# Altium PCB Main-PCB.pcbdoc
Units mil, origin at the board's own origin, x right, y up, seen from the top; angles counter-clockwise.
Board outline 3937 x 3937 mil, 2 copper layers (Top Layer, Bottom Layer), stack 62.2 mil thick; 82 components, 62 nets, 333 pads, 136 vias.
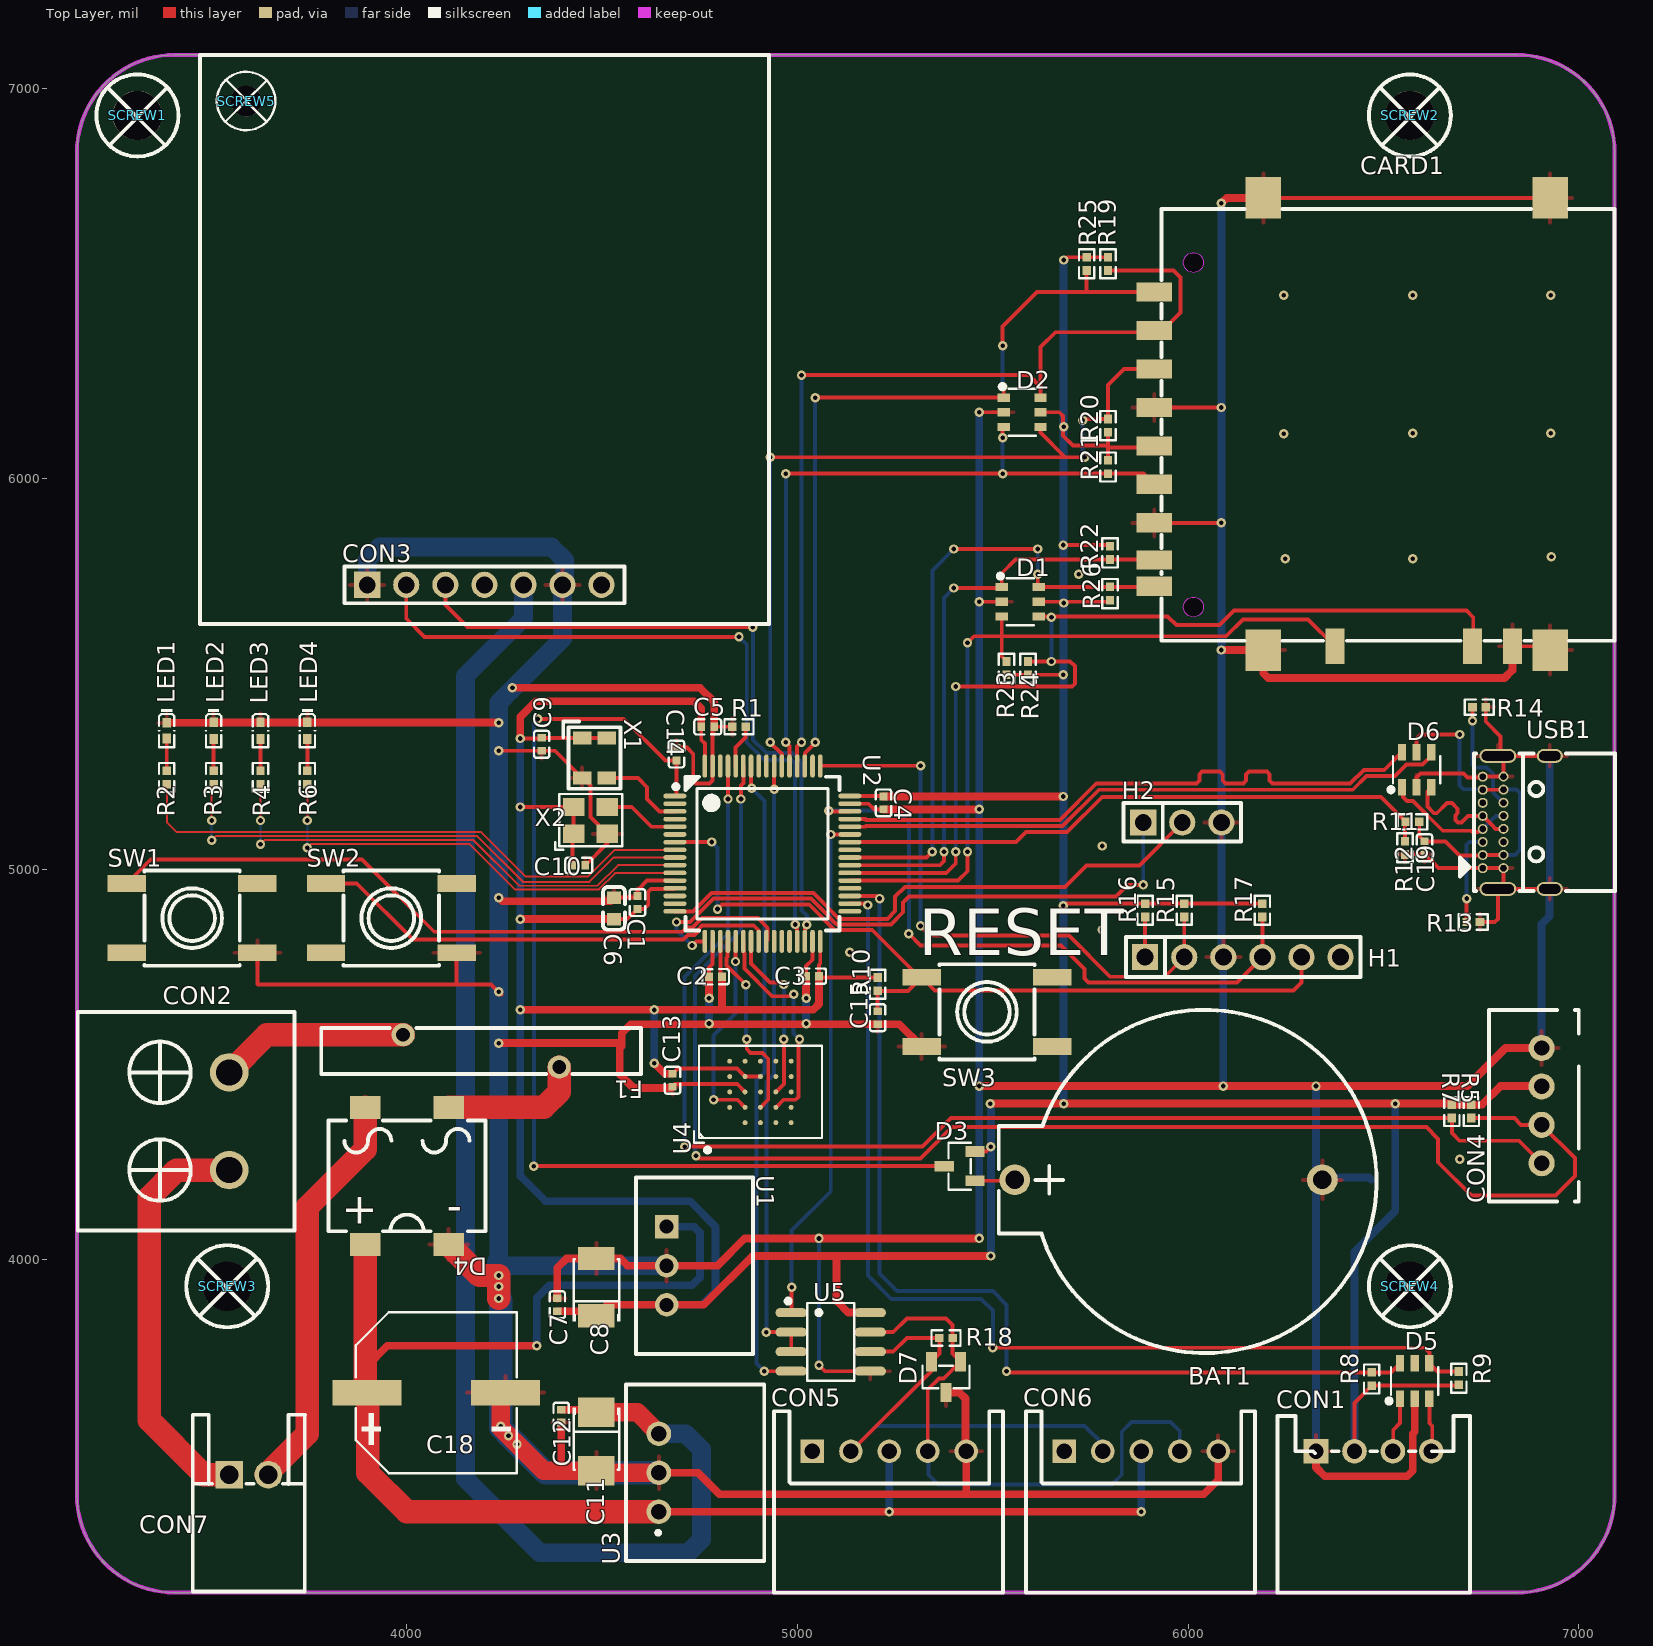
[diagram p0: Top Layer view]
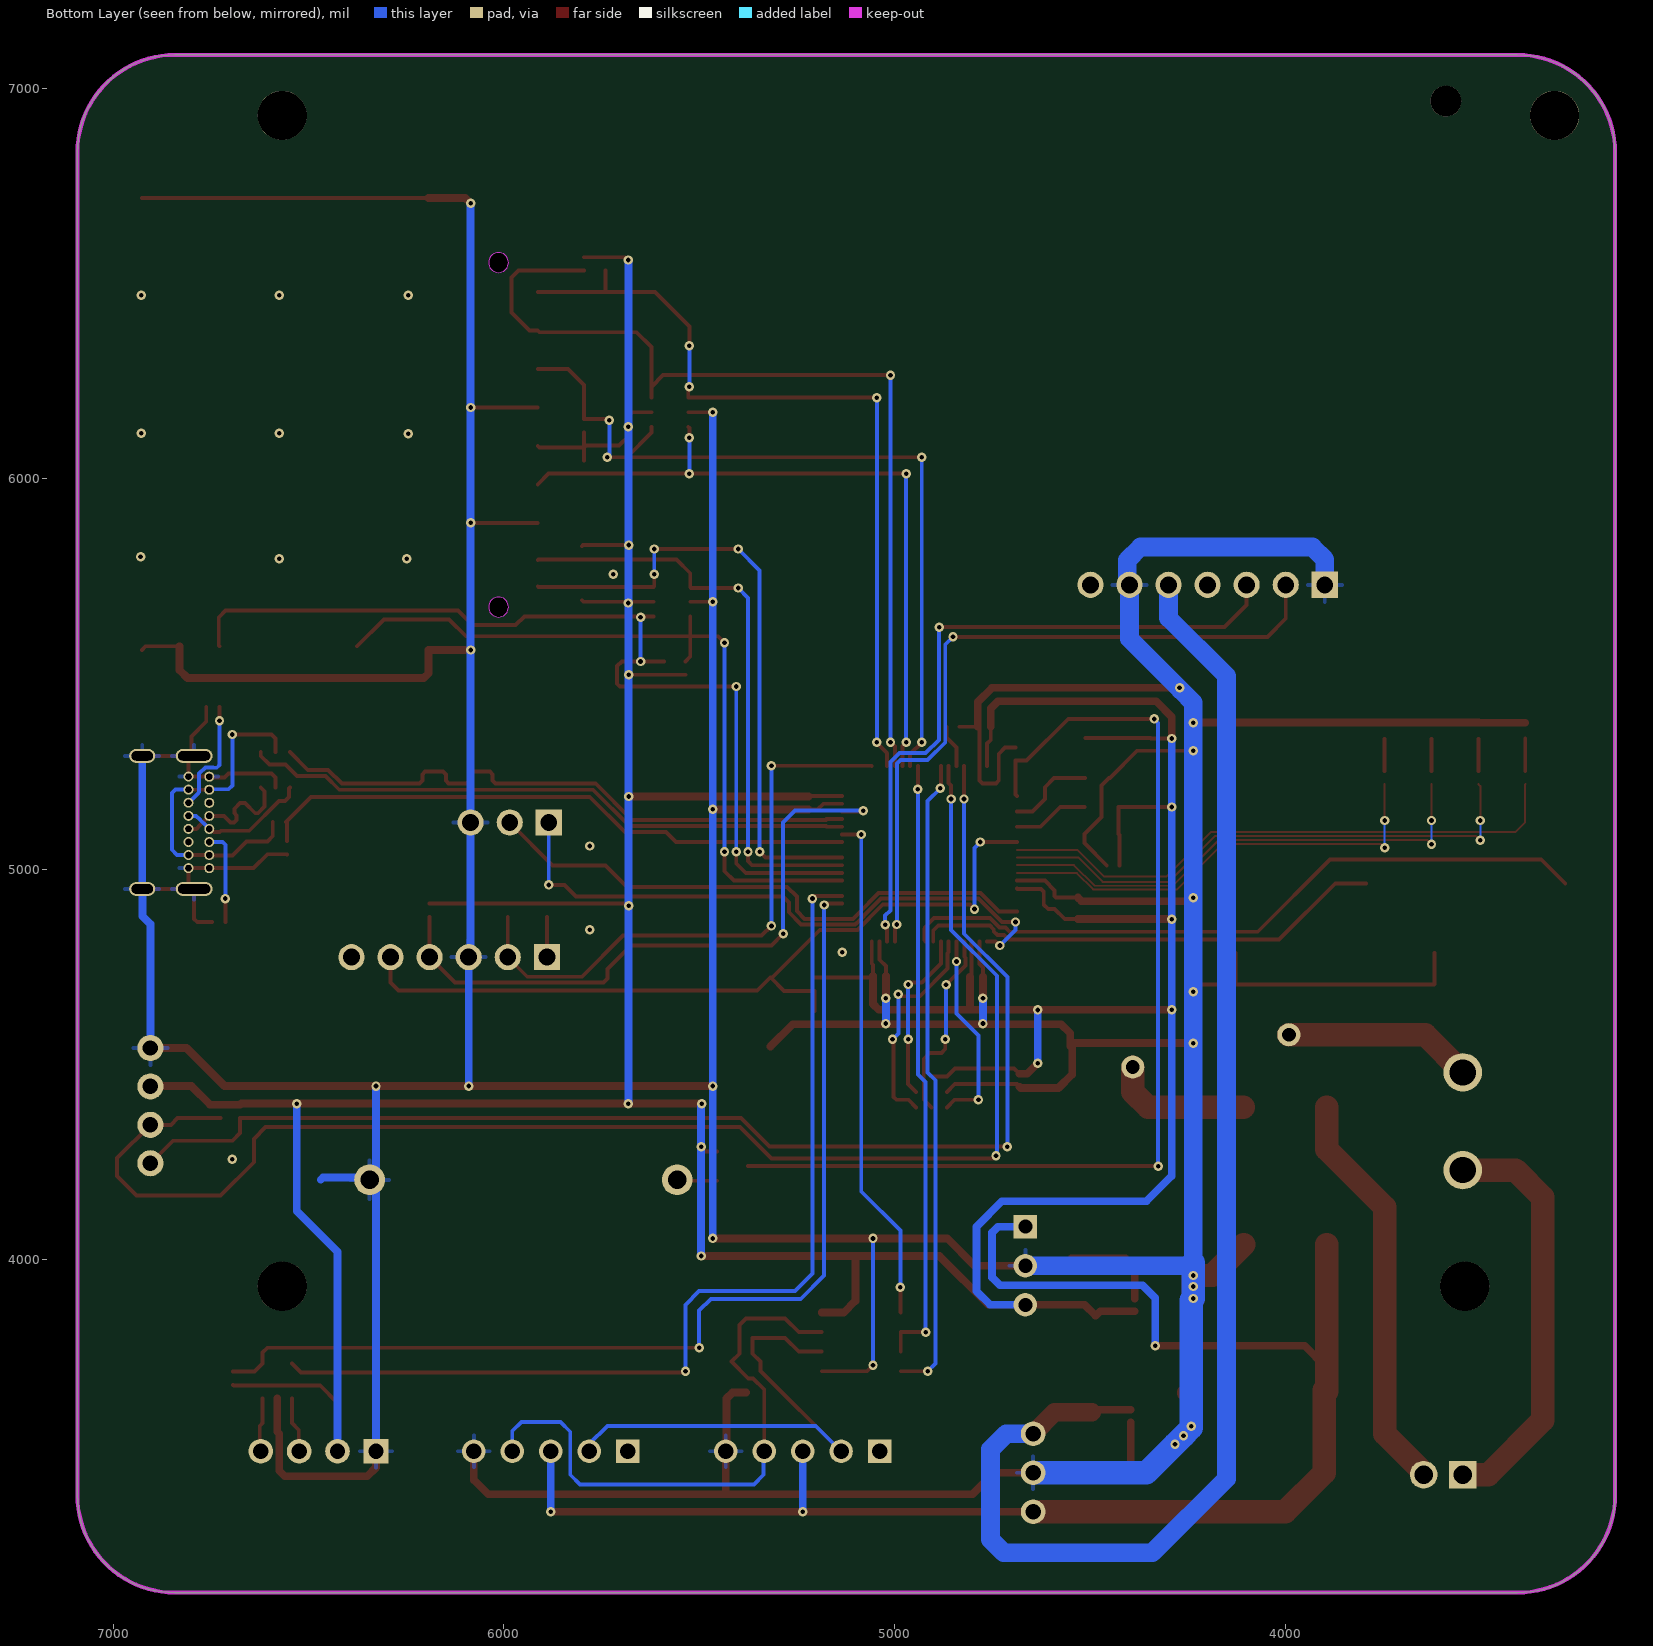
[diagram p1: Bottom Layer view, seen from below]

## Layer stack, top to bottom
Top Solder Mask Layer: solder mask 0.4, Dk 3.3
Top Layer: signal copper 1.4
Dielectric1: surface 59.4, FR4, Dk 4.5
Bottom Layer: signal copper 1.4
Bottom Solder Mask Layer: solder mask 0.4, Dk 3.3

## Board outline
3405,7085 ccw(c3405,6835) 3155,6835 3155,3398 ccw(c3405,3398) 3405,3148 6842,3148 ccw(c6842,3398) 7092,3398 7092,6835 ccw(c6842,6835) 6842,7085

## Design rules (kind name [scope] priority, off if disabled: settings)
BoardOutlineClearance copperThickness1oz [All] p0: genericclearance=10 ignorepadtopadclearanceinfootprint=FALSE except(0: Arc-SplitContinuation Track-SplitContinuation SMDPad-SplitContinuation THPad-SplitContinuation Via-SplitContinuation Fill-SplitContinuation Poly-SplitContinuation Region-SplitContinuation Text-SplitContinuation)
BoardOutlineClearance copperThickness2oz [All] p0: genericclearance=10 ignorepadtopadclearanceinfootprint=FALSE except(0: Arc-SplitContinuation Track-SplitContinuation SMDPad-SplitContinuation THPad-SplitContinuation Via-SplitContinuation Fill-SplitContinuation Poly-SplitContinuation Region-SplitContinuation Text-SplitContinuation)
BoardOutlineClearance Plane_innerPlane [All] p0: genericclearance=10 ignorepadtopadclearanceinfootprint=FALSE except(0: Arc-SplitContinuation Track-SplitContinuation SMDPad-SplitContinuation THPad-SplitContinuation Via-SplitContinuation Fill-SplitContinuation Poly-SplitContinuation Region-SplitContinuation Text-SplitContinuation)
BoardOutlineClearance Copper_copperRegion [All] p0: genericclearance=10 ignorepadtopadclearanceinfootprint=FALSE except(0: Arc-SplitContinuation Track-SplitContinuation SMDPad-SplitContinuation THPad-SplitContinuation Via-SplitContinuation Fill-SplitContinuation Poly-SplitContinuation Region-SplitContinuation Text-SplitContinuation)
BoardOutlineClearance otherClearance [All] p0: genericclearance=10 ignorepadtopadclearanceinfootprint=FALSE except(0: Arc-SplitContinuation Track-SplitContinuation SMDPad-SplitContinuation THPad-SplitContinuation Via-SplitContinuation Fill-SplitContinuation Poly-SplitContinuation Region-SplitContinuation Text-SplitContinuation)
Clearance copperThickness1oz [All] p1: gap=7 ignorepadtopadclearanceinfootprint=FALSE
Clearance copperThickness2oz [All] p1: gap=7 ignorepadtopadclearanceinfootprint=FALSE
Clearance Plane_innerPlane [All] p1: gap=7 ignorepadtopadclearanceinfootprint=FALSE
Clearance Copper_copperRegion [All] p1: gap=7 ignorepadtopadclearanceinfootprint=FALSE
Clearance otherClearance [All] p1: gap=7 ignorepadtopadclearanceinfootprint=FALSE
DiffPairsRouting differentialPair [All] p1: maxuncoupledlength=10 minlimit=6 maxlimit=Infinity mostfreqgap=6 toplayer_minwidth=5 toplayer_prefwidth=10 toplayer_maxwidth=100 bottomlayer_minwidth=5 bottomlayer_prefwidth=10 bottomlayer_maxwidth=100
PasteMaskExpansion pasteMaskExpansion [All] p1: expansion=0
PlaneConnect innerPlane [All] p1: planeconnectstyle=Relief reliefexpansion=20 reliefentries=4 reliefconductorwidth=10 reliefairgap=10
PolygonConnect copperRegion [All] p1: connectstyle=Relief reliefentries=4 reliefconductorwidth=10 polygonreliefangle="90 Angle" airgapwidth=10
RoutingVias viaSize [All] p1: viastyle="Through Hole" holewidth=12.0078 minholewidth=11.811 maxholewidth=248.0314 width=12.0078 minwidth=11.811 maxwidth=248.0314
SolderMaskExpansion solderMaskExpansion [IsVia] p1: useseparateexpansions=TRUE expansion=-1000 expansionbottom=-1000
SolderMaskExpansion solderMaskExpansion [All] p2: useseparateexpansions=TRUE expansion=2 expansionbottom=2
Width copperThickness1oz [All] p1: maxlimit=100 minlimit=5 preferedwidth=10
Width copperThickness2oz [All] p1: maxlimit=100 minlimit=8 preferedwidth=10

## Components (designator, comment, footprint, x,y, rotation, side; value= is the part's Value field where it differs from the comment)
BAT1 "KH-CR2032-2-1" BAT-TH_KH-CR2032-2-1 5950,4205 r180 top
C1 "100nF" C0402#1 4590.1,4914.9 r90 top
C2 "100nF" C0402#1 4790.1,4724.9 r180 top
C3 "100nF" C0402#2 5038.5,4726.5 r180 top
C4 "100nF" C0402#2 5220.1,5169.9 r270 top
C5 "100nF" C0402#2 4770.1,5364.9 r0 top
C6 "1uF" C0603 4530.1,4899.9 r90 top
C7 "100nF" C0402#3 4385,3885 r90 top
C8 "100uF" CASE-B_3528 4485,3930 r90 top
C9 "100nF" C0402#3 4345,5320 r90 top
C10 "100nF" C0402#3 4440,5010 r180 top
C11 "100uF" CAP-SMD_L3.5-W2.8-R-RD 4485,3535 r90 top
C12 "100nF" C0402#3 4395,3600 r270 top
C13 "100nF" C0402#3 4680,4460 r270 top
C14 "100nF" C0402#2 4690.1,5294.9 r270 top
C15 "100nF" C0402#3 5205,4620 r270 top
C18 "470uF" CAP-SMD_BD10.0-L10.3-W10.3-LS11.3-FD 4075,3660 r0 top
C19 "100nF" C0402#3 6605,5055 r270 top
CARD1 "DM1AA-SF-PEJ(82)" SD-SMD_DM1AA-SF-PEJ-82 6420,6140 r0 top locked
CON1 "S4B-XH-A(LF)(SN)" CONN-TH_S4B-XH-A-LF-SN 6475,3510 r180 top
CON2 "DBT50G-6.35-2P-BK-P OGC" CONN-TH_2P-P6.35_DBT50G-6.35-2P-BK-P 3545,4355 r270 top
CON3 "HC-PM254-5.0H-1x7PZ" HDR-TH_7P-P2.54-V-M-3 4198.3,5728.3 r0 top locked
CON4 "B4B-XH-A(LF)(SN)" CONN-TH_B4B-XH-A-LF-SN 6905,4395 r90 top
CON5 "S5B-XH-A(LF)(SN)" CONN-TH_5P-P2.50_S5B-XH-A-LF-SN 5235,3510 r0 top
CON6 "S5B-XH-A(LF)(SN)" CONN-TH_5P-P2.50_S5B-XH-A-LF-SN 5880,3510 r0 top
CON7 "S2B-XH-A-1(LF)(SN)" CONN-TH_S2B-XH-A-1-LF-SN 3595,3450 r180 top
D1 "USBLC6-4SC6Y-ES" TSOT-23-6_L2.9-W1.6-P0.95-LS2.8-BR 5570,5685 r180 top
D2 "USBLC6-4SC6Y-ES" TSOT-23-6_L2.9-W1.6-P0.95-LS2.8-BR 5575,6170 r180 top
D3 "BAT54C" SOT-23-3_L2.9-W1.3-P1.90-LS2.4-BR 5415,4240 r0 top
D4 "HBS510" DIO-BG-SMD_4P-L10.2-W7.0-P5.42-LS9.9-TR 4000,4215 r180 top
D5 "USBLC6-2SC6" SOT-23-6_L2.9-W1.6-P0.95-LS2.8-BL 6580,3690 r0 top
D6 "USBLC6-2SC6" SOT-23-6_L2.9-W1.6-P0.95-LS2.8-BL 6585,5255 r0 top
D7 "CDSOT23-SM712" SOT-23-3_L2.9-W1.3-P0.95-LS2.4-BR 5380,3700 r90 top
F1 "RXEF250" FUSE-TH_L20.8-W3.0-P10.15-D0.6-S2.10 4190,4535 r180 top
H1 "2541WV-06P" HDR-TH_6P-P2.54-V-M 6140,4775 r0 top
H2 "PH2.54-1X3P-H25" HDR-TH_3P-P2.54-V-M 5985,5120 r0 top
LED1 "TZ-P2-0402RTIA1-0.45T" LED0402-RD_RED 3385,5355 r270 top
LED2 "XL-1005UYC" LED0402-FD_YELLOW 3505,5355 r90 top
LED3 "BL-HGK37A-AV-TRB" LED0402 3625,5355 r270 top
LED4 "SZYY0402B" LED0402-RD_BLUE 3745,5355 r270 top
R1 "10kΩ" R0402#1 4850.1,5364.9 r180 top
R2 "220Ω" R0402#2 3385,5235 r90 top
R3 "220Ω" R0402#2 3505,5235 r90 top
R4 "220Ω" R0402#2 3625,5235 r90 top
R5 "4.7kΩ" R0402#2 6725,4380 r270 top
R6 "220Ω" R0402#2 3745,5235 r90 top
R7 "4.7kΩ" R0402#2 6675,4380 r270 top
R8 "4.7kΩ" R0402#2 6470,3695 r90 top
R9 "4.7kΩ" R0402#1 6693,3697 r90 top
R10 "10kΩ" R0402#1 5205,4705.9 r90 top
R11 "4.7kΩ" R0402#1 6574.6,5121.5 r180 top
R12 "10kΩ" R0402#2 6555,5055 r90 top
R13 "5.1kΩ" R0402#2 6730,4865 r180 top
R14 "5.1kΩ" R0402#2 6745,5415 r0 top
R15 "10kΩ" R0402#2 5990,4895 r90 top
R16 "220Ω" R0402#2 5890,4895 r270 top
R17 "10kΩ" R0402#2 6190,4895 r270 top
R18 "120Ω" R0402#2 5380,3800 r0 top
R19 "10kΩ" R0402#2 5795,6550 r90 top
R20 "10kΩ" R0402#3 5795,6135.9 r270 top
R21 "10kΩ" R0402#2 5795,6030 r90 top
R22 "10kΩ" R0402#2 5800,5810 r90 top
R23 "10kΩ" R0402#2 5535,5515 r90 top
R24 "10kΩ" R0402#2 5590,5515 r90 top
R25 "10kΩ" R0402#2 5740,6550 r270 top
R26 "10kΩ" R0402#1 5800,5705.9 r90 top
SCREW1 "" Screw-Hole-M3 3312.5,6927.5 r0 top locked
SCREW2 "" Screw-Hole-M3 6570,6927.5 r0 top locked
SCREW3 "" Screw-Hole-M3 3542.5,3930 r0 top
SCREW4 "" Screw-Hole-M3 6570,3930 r0 top locked
SCREW5 "" Screw-Hole-M2 3588.1,6966.9 r0 top locked
SW1 "K2-1157SP-I4SW-01" SW-SMD_4P-L6.2-W6.2-P4.50-LS8.6 3450,4875 r0 top
SW2 "K2-1157SP-I4SW-01" SW-SMD_4P-L6.2-W6.2-P4.50-LS8.6 3960,4875 r0 top
SW3 "K2-1157SP-I4SW-01" SW-SMD_4P-L6.2-W6.2-P4.50-LS8.6 5485,4635 r0 top
U1 "R-78E3.3-0.5" PWRM-TH_YLPTEC_R-78EXXX 4665,3985 r270 top
U2 "STM32L476RGT6" LQFP-64_L10.0-W10.0-P0.50-LS12.0-BL 4910,5040 r270 top
U3 "K7805-2000R3" PWRM-TH_K78XX-2000R3 4645,3455 r90 top
U4 "CY15B116QN-40BKXI" TFBGA-24_L8.0-W6.0-P1.00-TL_SPANSION_E2A024 4905,4430 r90 top
U5 "MAX3483ESA-TUDI" SOIC-8_L4.9-W3.9-P1.27-LS6.0-BL 5085,3790 r270 top
USB1 "USB4085-GF-A" USC-C-SMD_USB4085-GF-A 6840,5120 r90 top
X1 "32.768kHz" OSC-SMD_4P-L3.2-W2.5-BL_TG-5006CE 4480,5285 r270 top
X2 "8MHz" OSC-SMD_4P-L3.2-W2.5-BL 4470,5125 r0 top

## Footprints (in the part's own frame and the unit in brackets; to place one, negate y for a bottom-side part, rotate by r counter-clockwise, add the part's x,y. Pads: shape width x height; smd on the part's side, far side on the other; paste and mask are expansions set on the pad)
BAT-TH_KH-CR2032-2-1 [mil]
  round 78.7 hole 47.2: 1(393.7,0) 2(-393.7,0)
  silkscreen extent -532,-435 435,444
C0402#1 [mil]
  rect 19.7x21.3 smd: 1(-16.5,0) 2(16.6,0)
  silkscreen extent -34,-20 34,20
C0402#2 [mil]
  rect 19.7x21.3 smd: 1(-16.6,0) 2(16.5,0)
  silkscreen extent -34,-20 34,20
C0402#3 [mil]
  rect 19.7x21.3 smd: 1(-16.5,0) 2(16.5,0)
  silkscreen extent -34,-20 34,20
C0603 [mil]
  rect 31.5x35.4 smd: 1(-27.5,0) 2(27.6,0)
  silkscreen extent -55,-28 55,28
CAP-SMD_BD10.0-L10.3-W10.3-LS11.3-FD [mil]
  rect 177.2x65 smd: 1(-177.2,0) 2(177.2,0)
  silkscreen extent -206,-206 206,206
CAP-SMD_L3.5-W2.8-R-RD [mil]
  rect 74.8x93.5 smd: 1(74.8,0) 2(-74.7,0)
  silkscreen extent -72,-61 87,61
CASE-B_3528 [mil]
  rect 59.3x93.5 smd: 1(-73.2,0) 2(73.3,0)
  silkscreen extent -87,-61 72,61
CONN-TH_2P-P6.35_DBT50G-6.35-2P-BK-P [mil]
  round 98.4 hole 66.9 paste+0 mask+2: 1(-125,0) 2(125,0)
  silkscreen extent -280,-388 280,167
CONN-TH_5P-P2.50_S5B-XH-A-LF-SN [mil]
  rect 60x60 hole 39.4: 1(-196.9,0)
  round 60 hole 39.4: 2(-98.4,0) 3(0,0) 4(98.4,0) 5(196.9,0)
  silkscreen extent -295,-362 291,102
CONN-TH_B4B-XH-A-LF-SN [mil]
  round 66.9 hole 39.4: 1(147.6,0) 2(49.2,0) 3(-49.2,0) 4(-147.6,0)
  silkscreen extent -245,-95 245,135
CONN-TH_S2B-XH-A-1-LF-SN [mil]
  rect 70.9x70.9 hole 47.2: 1(50,0)
  round 70.9 hole 47.2: 2(-50,0)
  silkscreen extent -144,-154 143,299
CONN-TH_S4B-XH-A-LF-SN [mil]
  rect 63x63 hole 39.4: 1(147.6,0)
  round 63 hole 39.4: 2(49.2,0) 3(-49.2,0) 4(-147.6,0)
  silkscreen extent -246,-91 246,362
DIO-BG-SMD_4P-L10.2-W7.0-P5.42-LS9.9-TR [mil]
  rect 78.7x59.1 smd: 1(106.8,175.6) 2(-106.8,175.6) 3(-106.8,-175.6) 4(106.8,-175.6)
  silkscreen extent -201,-142 201,142
FUSE-TH_L20.8-W3.0-P10.15-D0.6-S2.10 [mil]
  round 59.1 hole 35.4 paste+0 mask+2: 1(-199.8,41.3) 2(199.8,-41.3)
  silkscreen extent -409,-59 409,59
HDR-TH_3P-P2.54-V-M [mil]
  rect 66.9x66.9 hole 43.3: 1(-100,0)
  round 66.9 hole 43.3: 2(0,0) 3(100,0)
  silkscreen extent -150,-49 150,49
HDR-TH_6P-P2.54-V-M [mil]
  rect 66.9x66.9 hole 43.3: 1(-250,0)
  round 66.9 hole 43.3: 2(-150,0) 3(-50,0) 4(50,0) 5(150,0) 6(250,0)
  silkscreen extent -299,-51 301,51
HDR-TH_7P-P2.54-V-M-3 [mil]
  rect 66.9x66.9 hole 43.3: 1(-300,0)
  round 66.9 hole 43.3: 2(-200,0) 3(-100,0) 4(0,0) 5(100,0) 6(200,0) 7(300,0)
  silkscreen extent -358,-47 358,47
LED0402 [mil]
  rect 25.1x21.3 smd paste-3937 mask+2: 1(-21.2,0) 2(21.2,0)
  silkscreen extent -43,-21 43,21
LED0402-FD_YELLOW [mil]
  rect 25.1x21.3 smd paste-3937 mask+2: 1(-21.2,0) 2(21.2,0)
  silkscreen extent -43,-21 55,21
LED0402-RD_BLUE [mil]
  rect 25.1x21.3 smd paste-3937 mask+2: 1(-21.2,0) 2(21.2,0)
  silkscreen extent -55,-21 43,21
LED0402-RD_RED [mil]
  rect 25.1x21.3 smd paste-3937 mask+2: 1(-20,0) 2(20,0)
  silkscreen extent -55,-21 43,21
LQFP-64_L10.0-W10.0-P0.50-LS12.0-BL [mil]
  oval 11.8x59.1 smd: 1(-147.6,-223.9) 2(-127.9,-223.9) 3(-108.3,-223.9) 4(-88.6,-223.9) 5(-68.9,-223.9) 6(-49.2,-223.9) 7(-29.5,-223.9) 8(-9.8,-223.9) 9(9.8,-223.9) 10(29.5,-223.9) 11(49.2,-223.9) 12(68.9,-223.9) 13(88.6,-223.9) 14(108.3,-223.9) 15(127.9,-223.9) 16(147.6,-223.9) 33(147.6,223.9) 34(127.9,223.9) 35(108.3,223.9) 36(88.6,223.9) 37(68.9,223.9) 38(49.2,223.9) 39(29.5,223.9) 40(9.8,223.9) 41(-9.8,223.9) 42(-29.5,223.9) 43(-49.2,223.9) 44(-68.9,223.9) 45(-88.6,223.9) 46(-108.3,223.9) 47(-127.9,223.9) 48(-147.6,223.9)
  oval 59.1x11.8 smd: 17(224.4,-147.2) 18(224.4,-127.5) 19(224.4,-107.8) 20(224.4,-88.1) 21(224.4,-68.4) 22(224.4,-48.7) 23(224.4,-29.1) 24(224.4,-9.4) 25(224.4,10.3) 26(224.4,30) 27(224.4,49.7) 28(224.4,69.4) 29(224.4,89) 30(224.4,108.7) 31(224.4,128.4) 32(224.4,148.1) 49(-224.4,148.1) 50(-224.4,128.4) 51(-224.4,108.7) 52(-224.4,89) 53(-224.4,69.4) 54(-224.4,49.7) 55(-224.4,30) 56(-224.4,10.3) 57(-224.4,-9.4) 58(-224.4,-29.1) 59(-224.4,-48.7) 60(-224.4,-68.4) 61(-224.4,-88.1) 62(-224.4,-107.8) 63(-224.4,-127.5) 64(-224.4,-147.2)
  silkscreen extent -197,-228 197,197
OSC-SMD_4P-L3.2-W2.5-BL [mil]
  rect 55.1x47.2 smd: 1(-43.3,-34.4) 2(43.3,-34.4) 3(43.3,34.4) 4(-43.3,34.4)
  silkscreen extent -90,-75 82,68
OSC-SMD_4P-L3.2-W2.5-BL_TG-5006CE [mil]
  rect 33.5x47.2 smd: 1(-51.2,-31.5) 2(51.2,-31.5) 3(51.2,31.5) 4(-51.2,31.5)
  silkscreen extent -94,-80 79,67
PWRM-TH_K78XX-2000R3 [mil]
  round 63 hole 39.4: 1(-100,0) 2(0,0) 3(100,0)
  silkscreen extent -226,-270 226,85
PWRM-TH_YLPTEC_R-78EXXX [mil]
  rect 60x60 hole 36: 1(-100,0)
  round 60 hole 36: 2(0,0) 3(100,0)
  silkscreen extent -226,-79 226,221
R0402#1 [mil]
  rect 22.3x21.3 smd paste-3937 mask+2: 1(-17,0) 2(17.1,0)
  silkscreen extent -37,-20 37,20
R0402#2 [mil]
  rect 22.3x21.3 smd paste-3937 mask+2: 1(-17,0) 2(17,0)
  silkscreen extent -37,-20 37,20
R0402#3 [mil]
  rect 22.3x21.3 smd paste-3937 mask+2: 1(-17.1,0) 2(17,0)
  silkscreen extent -37,-20 37,20
Screw-Hole-M2 [mil]
  round 78.7 hole 78.7: 1(0,0)
  silkscreen extent -75,-75 75,75
Screw-Hole-M3 [mil]
  round 126 hole 126 paste+0 mask+4: 1(-2.5,2.5)
  silkscreen extent -108,-102 102,108
SD-SMD_DM1AA-SF-PEJ-82 [mil]
  rect 90.6x49.2 smd: 1(-506.9,239.2) 2(-506.9,140.7) 3(-506.9,42.3) 4(-506.9,-56.1) 5(-506.9,-154.5) 6(-506.9,-253) 7(-506.9,-348.4) 8(-506.9,-415.4) 9(-506.9,337.6)
  rect 49.2x90.6 smd: 10(-44.3,-568.9) 11(308.1,-568.9) 12(410.4,-568.9)
  rect 90.6x106.3 smd: 13(-227.4,-578.7) 14(506.9,-578.7) 15(506.9,578.7) 16(-227.4,578.7)
  Board Outline Layer lines w0.1: -432.1,-468.5 -431.7,-472.9 -430.5,-477.3 -428.7,-481.3 -426.1,-485 -422.9,-488.1 -419.3,-490.7 -415.2,-492.6 -410.9,-493.7 -406.5,-494.1 -402.1,-493.7 -397.7,-492.6 -393.7,-490.7 -390,-488.1 -386.9,-485 -384.3,-481.3 -382.4,-477.3 -381.3,-472.9 -380.9,-468.5 -381.3,-464.1 -382.4,-459.8 -384.3,-455.7 -386.9,-452.1 -390,-448.9 -393.7,-446.3 -397.7,-444.5 -402.1,-443.3 -406.5,-442.9 -410.9,-443.3 -415.2,-444.5 -419.3,-446.3 -422.9,-448.9 -426.1,-452.1 -428.7,-455.7 -430.5,-459.8 -431.7,-464.1 -432.1,-468.5 ; -432.1,413.4 -431.7,408.9 -430.5,404.6 -428.7,400.6 -426.1,396.9 -422.9,393.8 -419.3,391.2 -415.2,389.3 -410.9,388.2 -406.5,387.8 -402.1,388.2 -397.7,389.3 -393.7,391.2 -390,393.8 -386.9,396.9 -384.3,400.6 -382.4,404.6 -381.3,408.9 -380.9,413.4 -381.3,417.8 -382.4,422.1 -384.3,426.2 -386.9,429.8 -390,433 -393.7,435.5 -397.7,437.4 -402.1,438.6 -406.5,439 -410.9,438.6 -415.2,437.4 -419.3,435.5 -422.9,433 -426.1,429.8 -428.7,426.2 -430.5,422.1 -431.7,417.8 -432.1,413.4
  Board Outline Layer region: -380.9,413.4 -381.3,408.9 -382.4,404.6 -384.3,400.6 -386.9,396.9 -390,393.8 -393.7,391.2 -397.7,389.3 -402.1,388.2 -406.5,387.8 -410.9,388.2 -415.2,389.3 -419.3,391.2 -422.9,393.8 -426.1,396.9 -428.7,400.6 -430.5,404.6 -431.7,408.9 -432.1,413.4 -431.7,417.8 -430.5,422.1 -428.7,426.2 -426.1,429.8 -422.9,433 -419.3,435.5 -415.2,437.4 -410.9,438.6 -406.5,439 -402.1,438.6 -397.7,437.4 -393.7,435.5 -390,433 -386.9,429.8 -384.3,426.2 -382.4,422.1 -381.3,417.8
  Board Outline Layer region: -380.9,413.4 -381.3,408.9 -382.4,404.6 -384.3,400.6 -386.9,396.9 -390,393.8 -393.7,391.2 -397.7,389.3 -402.1,388.2 -406.5,387.8 -410.9,388.2 -415.2,389.3 -419.3,391.2 -422.9,393.8 -426.1,396.9 -428.7,400.6 -430.5,404.6 -431.7,408.9 -432.1,413.4 -431.7,417.8 -430.5,422.1 -428.7,426.2 -426.1,429.8 -422.9,433 -419.3,435.5 -415.2,437.4 -410.9,438.6 -406.5,439 -402.1,438.6 -397.7,437.4 -393.7,435.5 -390,433 -386.9,429.8 -384.3,426.2 -382.4,422.1 -381.3,417.8
  Board Outline Layer region: -380.9,-468.5 -381.3,-472.9 -382.4,-477.3 -384.3,-481.3 -386.9,-485 -390,-488.1 -393.7,-490.7 -397.7,-492.6 -402.1,-493.7 -406.5,-494.1 -410.9,-493.7 -415.2,-492.6 -419.3,-490.7 -422.9,-488.1 -426.1,-485 -428.7,-481.3 -430.5,-477.3 -431.7,-472.9 -432.1,-468.5 -431.7,-464.1 -430.5,-459.8 -428.7,-455.7 -426.1,-452.1 -422.9,-448.9 -419.3,-446.3 -415.2,-444.5 -410.9,-443.3 -406.5,-442.9 -402.1,-443.3 -397.7,-444.5 -393.7,-446.3 -390,-448.9 -386.9,-452.1 -384.3,-455.7 -382.4,-459.8 -381.3,-464.1
  Board Outline Layer region: -380.9,-468.5 -381.3,-472.9 -382.4,-477.3 -384.3,-481.3 -386.9,-485 -390,-488.1 -393.7,-490.7 -397.7,-492.6 -402.1,-493.7 -406.5,-494.1 -410.9,-493.7 -415.2,-492.6 -419.3,-490.7 -422.9,-488.1 -426.1,-485 -428.7,-481.3 -430.5,-477.3 -431.7,-472.9 -432.1,-468.5 -431.7,-464.1 -430.5,-459.8 -428.7,-455.7 -426.1,-452.1 -422.9,-448.9 -419.3,-446.3 -415.2,-444.5 -410.9,-443.3 -406.5,-442.9 -402.1,-443.3 -397.7,-444.5 -393.7,-446.3 -390,-448.9 -386.9,-452.1 -384.3,-455.7 -382.4,-459.8 -381.3,-464.1
  Multi-Layer board cut-out: -380.9,413.4 -381.3,408.9 -382.4,404.6 -384.3,400.6 -386.9,396.9 -390,393.8 -393.7,391.2 -397.7,389.3 -402.1,388.2 -406.5,387.8 -410.9,388.2 -415.2,389.3 -419.3,391.2 -422.9,393.8 -426.1,396.9 -428.7,400.6 -430.5,404.6 -431.7,408.9 -432.1,413.4 -431.7,417.8 -430.5,422.1 -428.7,426.2 -426.1,429.8 -422.9,433 -419.3,435.5 -415.2,437.4 -410.9,438.6 -406.5,439 -402.1,438.6 -397.7,437.4 -393.7,435.5 -390,433 -386.9,429.8 -384.3,426.2 -382.4,422.1 -381.3,417.8
  Multi-Layer board cut-out: -380.9,-468.5 -381.3,-472.9 -382.4,-477.3 -384.3,-481.3 -386.9,-485 -390,-488.1 -393.7,-490.7 -397.7,-492.6 -402.1,-493.7 -406.5,-494.1 -410.9,-493.7 -415.2,-492.6 -419.3,-490.7 -422.9,-488.1 -426.1,-485 -428.7,-481.3 -430.5,-477.3 -431.7,-472.9 -432.1,-468.5 -431.7,-464.1 -430.5,-459.8 -428.7,-455.7 -426.1,-452.1 -422.9,-448.9 -419.3,-446.3 -415.2,-444.5 -410.9,-443.3 -406.5,-442.9 -402.1,-443.3 -397.7,-444.5 -393.7,-446.3 -390,-448.9 -386.9,-452.1 -384.3,-455.7 -382.4,-459.8 -381.3,-464.1
  silkscreen extent -488,-555 672,550
SOIC-8_L4.9-W3.9-P1.27-LS6.0-BL [mil]
  oval 23.1x80.5 smd: 1(-75,-101.2) 2(-25,-101.2) 3(25,-101.2) 4(75,-101.2) 5(75,101.2) 6(25,101.2) 7(-25,101.2) 8(-75,101.2)
  silkscreen extent -110,-115 100,60
SOT-23-3_L2.9-W1.3-P0.95-LS2.4-BR [mil]
  rect 49.2x27.6 smd: 1(39.4,-37.4) 2(39.4,37.4) 3(-39.4,0)
  silkscreen extent -29,-60 29,60
SOT-23-3_L2.9-W1.3-P1.90-LS2.4-BR [mil]
  rect 49.2x27.6 smd: 1(39.4,-37.4) 2(39.4,37.4) 3(-39.4,0)
  silkscreen extent -29,-60 29,60
SOT-23-6_L2.9-W1.6-P0.95-LS2.8-BL [mil]
  rect 20.9x42.2 smd: 1(-37.4,-45.2) 2(0,-45.2) 3(37.4,-45.2) 4(37.4,45.2) 5(0,45.2) 6(-37.4,45.2)
  silkscreen extent -72,-57 61,35
SW-SMD_4P-L6.2-W6.2-P4.50-LS8.6 [mil]
  rect 98.4x43.3 smd: 1(-167.3,88.6) 2(167.3,88.6) 3(-167.3,-88.6) 4(167.3,-88.6)
  silkscreen extent -122,-122 122,122
TFBGA-24_L8.0-W6.0-P1.00-TL_SPANSION_E2A024 [mil]
  round 12.6 smd paste-3937 mask+2: A2(-39.4,78.7) A3(0,78.7) A4(39.4,78.7) A5(78.7,78.7) B1(-78.7,39.4) B2(-39.4,39.4) B3(0,39.4) B4(39.4,39.4) B5(78.7,39.4) C1(-78.7,0) C2(-39.4,0) C3(0,0) C4(39.4,0) C5(78.7,0) D1(-78.7,-39.4) D2(-39.4,-39.4) D3(0,-39.4) D4(39.4,-39.4) D5(78.7,-39.4) E1(-78.7,-78.7) E2(-39.4,-78.7) E3(0,-78.7) E4(39.4,-78.7) E5(78.7,-78.7)
  silkscreen extent -154,-158 118,170
TSOT-23-6_L2.9-W1.6-P0.95-LS2.8-BR [mil]
  rect 31.5x20.9 smd: 1(47.2,-37.4) 2(47.2,0) 3(47.2,37.4) 4(-47.2,37.4) 5(-47.2,0) 6(-47.2,-37.4)
  silkscreen extent -35,-72 57,60
USC-C-SMD_USB4085-GF-A [mil]
  round 25.6 hole 15.7 slot 15.8 at 0 deg paste+0 mask+2: A1(-117.1,85.8) A4(-83.7,85.8) A5(-50.2,85.8) A6(-16.7,85.8) A7(16.7,85.8) A8(50.2,85.8) A9(83.7,85.8) A12(117.1,85.8) B1(117.3,32.7) B4(83.9,32.7) B5(50.4,32.7) B6(16.9,32.7) B7(-16.5,32.7) B8(-50,32.7) B9(-83.5,32.7) B12(-117.1,32.7)
  oval 35.4x66.9 hole 23.6 slot 55.1 at 90 deg paste+0 mask+2: S1(-170.3,-85.8) S1(170.3,-85.8)
  oval 35.4x94.5 hole 23.6 slot 82.7 at 90 deg paste+0 mask+2: S1(-170.3,47.2) S1(170.3,47.2)
  silkscreen extent -176,-253 176,144

## Via types
v1: diameter 24, hole 12, Top Layer to Bottom Layer, 136 vias

## Nets (pads, with @x,y where several pads share a name; then routed paths per layer and width w, separated by ;. In a path a pad name is that pad's centre, name@x,y a point inside that pad or via, vN(x,y) a via of type N, cw(c..) or ccw(c..) an arc to the next point about the centre after c; other vN are vias at no path point)
$1N3864: BAT1.1 D3.1 | length 102.9
  Top Layer w10: D3.1 5553.9,4202.6 BAT1.1
$1N12822: SW2.1 U2.24 | length 1218.3
  Top Layer w10: SW2.1 3871.4,4963.6 4015,4820 4707.5,4820 4719.5,4832 4736.7,4832 4745.9,4841.2 4745.9,4846.2 4755.8,4856.1 4887.9,4856.1 4900.6,4843.4 U2.24
$1N12827: SW1.1 U2.25 | length 1803.4
  Top Layer w10: SW1.1 3344.1,5025 3885,5025 4070,4840 4705,4840 4716,4851 4730.9,4851 4755,4875.1 4898.7,4875.1 4922.5,4851.3 4922.5,4847.5 4923.1,4846.9 4923.1,4818.4 U2.25
$1N14519: LED3.2 R4.2 | length 81.8
  Top Layer w10: R4.2 LED3.2
$1N14521: LED2.1 R3.2 | length 81.8
  Top Layer w10: R3.2 LED2.1
$1N14523: LED1.2 R2.2 | length 83
  Top Layer w10: R2.2 LED1.2
$1N14525: LED4.2 R6.2 | length 81.8
  Top Layer w10: R6.2 LED4.2
$1N18643: R2.1 U2.8 | length 1484.3
  Top Layer w5: R2.1 3385.3,5217.7 3385.3,5120 3410.3,5095 4190,5095 4303.1,4981.9 4463.9,4981.9 4531.8,5049.8 U2.8
$1N18649: R3.1 U2.9 | length 1410.6
  Top Layer w5: v1(3500,5074.5) 3510.5,5085 4180,5085 4297.1,4967.9 4467.3,4967.9 4529.9,5030.5 4680.8,5030.5 4681.1,5030.2 U2.9 ; v1(3500,5125) 3500,5213 R3.1
  Bottom Layer w5: v1(3500,5074.5) v1(3500,5125)
$1N18657: R4.1 U2.10 | length 1290.3
  Top Layer w5: v1(3625,5064) 3636,5075 3736,5075 3736.5,5075.5 3753.5,5075.5 3754,5075 4170,5075 4287.1,4957.9 4487.8,4957.9 4540.5,5010.5 U2.10 ; v1(3625,5125) R4.1
  Bottom Layer w5: v1(3625,5064) v1(3625,5125)
$1N18663: R6.1 U2.11 | length 1173.8
  Top Layer w5: v1(3745,5055) 3755,5065 4160,5065 4276.2,4948.8 4491.6,4948.8 4532.7,4990 4685.3,4990 U2.11 ; v1(3745,5125) R6.1
  Bottom Layer w5: v1(3745,5055) v1(3745,5125)
$1N30793: U2.3 X1.3 | length 227.6
  Top Layer w10: X1.3 4591.2,5233.8 4615,5210 4615,5180 4646.8,5148.2 U2.3@4686.1,5148.2
$1N30805: U2.5 X2.3 | length 193.7
  Top Layer w10: X2.3 4575.6,5159.4 4626.1,5108.9 U2.5
$2N733: R14.1 USB1.B5 | length 295.9
  Top Layer w10: v1(6727.9,5380) R14.1@6727.9,5415
  Bottom Layer w10: v1(6727.9,5380) 6727.9,5267.1 6735,5260 6743.4,5260 6744.3,5260.9 6764.1,5260.9 6780,5245 6780,5197.7 6783.5,5194.2 6783.5,5194 6797.5,5180.1 6797.6,5180.1 USB1.B5
$2N739: R13.2 USB1.A5 | length 242.2
  Top Layer w10: R13.2 v1@6713,4925
  Bottom Layer w10: v1(6712.9,4925) 6712.9,5062.9 6720,5070 6754,5070 USB1.A5
$2N3591: CON5.4 CON6.4 D7.1 R18.2 U5.7 | length 1512.4
  Top Layer w10: U5.7 5245,3815 5280,3850 5380,3850 5397,3833 R18.2 5397,3759.7 D7.1 5374.3,3696.2 5361.7,3696.2 5333.4,3668 CON5.4
  Bottom Layer w10: CON5.4 5335,3508.4 5335,3450 5360,3425 5805,3425 5830,3450 5830,3560 5855,3585 5955,3585 5978.4,3561.6 CON6.4
$2N3597: CON5.2 CON6.2 D7.2 R18.1 U5.6 | length 1284.7
  Top Layer w10: CON5.2 5342.6,3716 D7.2 5363,3759.7 R18.1 5280,3800 5245,3765 U5.6
  Bottom Layer w10: CON5.2 5201.6,3575 5735,3575 5781.6,3528.4 CON6.2
$2N4144: CON1.3 D5.1 | length 142.4
  Top Layer w10: CON1.3 6525,3510.8 6525,3565 6542.6,3582.6 D5.1
$2N4151: CON1.4 D5.3 | length 138.9
  Top Layer w10: D5.3 6617.4,3582.6 6625,3575 6625,3512.4 CON1.4
$2N5915: H1.1 R16.2 | length 103
  Top Layer w10: H1.1 R16.2
$2N15127: CON7.2 D4.4 | length 1045.5
  Top Layer w60: CON7.2@3640,3450 3745,3555 3745,4135 3893.2,4283.2 D4.4
$2N15129: CON2.2 CON7.1 | length 1067
  Top Layer w60: CON7.1 3480,3450 3340,3590 3340,4160 3410,4230 CON2.2
$2N15130: D4.3 F1.1 | length 363.3
  Top Layer w60: D4.3 4350.6,4390.6 4390,4430 4390,4493.5 F1.1
$2N15131: CON2.1 F1.2 | length 485.1
  Top Layer w60: CON2.1 3641.3,4576.3 F1.2
+5V: C11.1 C12.1 CON3.5 U3.3 | length 3678.4
  Top Layer w20: C12.1 4488.2,3616.5 C11.1@4495,3609.8
  Top Layer w48: C11.1@4495,3609.8 4590.3,3609.8 U3.3
  Bottom Layer w48: CON3.5 4298.3,5643.3 4150,5495 4150,3440 4340,3250 4720,3250 4753.9,3283.9 4753.9,3515 4713.9,3555 U3.3
+12V: C18.1 CON5.3 CON6.3 D4.1 U1.1 U3.1 | length 4159.3
  Top Layer w20: 3895,3725 3950,3780 v1(4332.5,3780) ; U3.1 v1(5235,3355) v1(5880,3355)
  Top Layer w60: D4.1@3893.7,4039.4 3893.7,3664.1 C18.1 ; C18.1@3895,3671.5 3900,3666.5 3900,3455 4000,3355 U3.1
  Bottom Layer w20: v1(4332.5,3780) 4332.5,3902.5 4365,3935 4730,3935 4750,3955 4750,4070 4735,4085 U1.1 ; v1(5235,3355) CON5.3 ; v1(5880,3355) CON6.3
BOOT0: R1.1 U2.60 | length 111.2
  Top Layer w10: U2.60@4841.6,5264.3 4841.6,5311.6 4867.1,5337.1 R1.1
CONSOLE_RX: H2.1 U2.17 | length 1577.9
  Top Layer w10: v1(4690,4865) 4725.1,4865 4785.1,4925 5034.8,4925 5079.4,4880.4 5079.4,4879.6 5097.5,4861.5 5098.4,4861.5 5100.8,4859 5239,4859 5270,4890 5270,4915 5285,4930 5815,4930 5845,4960 v1(5885,4960) ; v1(4730,4805) 4740.6,4815.6 U2.17
  Bottom Layer w10: v1(4690,4865) 4690,4845 v1(4730,4805) ; v1(5885,4960) H2.1
CONSOLE_TX: H2.2 U2.16 | length 1470
  Top Layer w10: U2.16@4686.1,4892.3 4732.5,4892.3 4779.3,4939 5040.6,4939 5093.4,4886.2 5093.4,4885.4 5103.3,4875.5 5104.2,4875.5 5106.6,4873 5230,4873 5250,4893 5250,4930 5275,4955 5685,4955 5740,5010 5875,5010 H2.2
D_M: D6.3 USB1.A7 USB1.B7 | length 332.5
  Top Layer w10: D6.3 6612.4,5199.8 6612.4,5160.7 6629.6,5143.5 6636.5,5143.5 6663.1,5170 6675,5170 6690,5155 6690,5143.8 6684.4,5138.2 6684.4,5126.1 6690.5,5120 6700,5120 6716.7,5136.7 USB1.A7 6763.9,5127 6764,5127 6778,5113.1 6778,5113 6787.4,5103.5 USB1.B7
D_P: D6.1 USB1.A6 USB1.B6 | length 337.3
  Top Layer w10: D6.1 6550,5207.4 6550,5185 6560,5175 6575.5,5175 6651.9,5098.6 6724.9,5098.6 6728,5095.5 6742.1,5095.5 6750,5103.3 USB1.A6
  Bottom Layer w10: USB1.A6 6763.9,5113 6764,5113 6778,5126.9 6778,5127 6787.8,5136.9 USB1.B6
EXT_SCL: D5.4 R9.2 U2.34 | length 2682.6
  Top Layer w10: U2.34@5134,4912 5176.7,4912 v1(5180,4908.7) ; v1(5500,3775) 6605,3775 6617.4,3762.6 D5.4 6638.6,3714.1 R9.2
  Bottom Layer w10: v1(5180,4908.7) 5180,3960 5240,3900 5470,3900 5500,3870 v1(5500,3775)
EXT_SDA: D5.6 R8.2 U2.35 | length 2585.3
  Top Layer w10: U2.35@5134,4931.6 5203.4,4931.6 v1(5210,4925) ; v1(5535,3715) 5538,3712 R8.2 6519.4,3712 D5.6
  Bottom Layer w10: v1(5210,4925) 5210,3965 5255,3920 5500,3920 5535,3885 v1(5535,3715)
FRAM_CS: U2.20 U4.C2 | length 496.9
  Top Layer w10: U2.20@4822,4815.5 4821,4814.6 4821,4776.2 4818.1,4773.3 4818.1,4754.2 4867.5,4704.8 v1(4867.8,4704.8) ; v1(4870,4565) 4870,4540 4880,4530 4910,4530 4925,4515 4925,4410.6 U4.C2
  Bottom Layer w10: v1(4867.8,4704.8) 4867.8,4567.2 v1(4870,4565)
FRAM_MISO: U2.22 U4.D2 | length 566.1
  Top Layer w10: U2.22@4861.3,4815.5 4861.3,4787.7 4864.1,4784.9 4864.1,4745.9 4935,4675 4985,4675 v1(4990,4680) ; U4.D2 4963.7,4410 4995,4410 5002.5,4417.5 v1@5002.5,4565
  Bottom Layer w10: v1(4990,4680) 4990,4580 v1(5005,4565)
FRAM_MOSI: U2.23 U4.D3 | length 446.4
  Top Layer w10: U2.23@4881,4815.5 4881,4759 4930,4710 4960,4710 v1(4965,4705) ; U4.D3 4965,4450.6 v1(4965,4565)
  Bottom Layer w10: v1(4965,4565) v1(4965,4705)
FRAM_SCK: U2.21 U4.B2 | length 517.6
  Top Layer w10: v1(4785,4410) 4846.3,4410 U4.B2 ; v1(4841.1,4763.8) 4841.6,4764.3 U2.21@4841.6,4815.5
  Bottom Layer w10: v1(4785,4410) 4785,4575 4841.1,4631.1 v1(4841.1,4763.8)
GND: BAT1.2 C1.2 C2.2 C3.2 C4.2 C5.2 C6.2 C7.2 C8.2 C9.1 C10.1 C11.2 C12.2 C13.2 C14.1 C15.2 C18.2 C19.2 CARD1.3 CARD1.6 CARD1.12 CARD1.13 CARD1.14 CARD1.15 CARD1.16 CON1.1 CON3.1 CON3.6 CON4.1 CON5.5 CON6.5 D1.2 D2.2 D4.2 D5.2 D6.2 D7.3 H1.3 H2.3 LED1.1 LED2.2 LED3.1 LED4.1 R1.2 R12.1 R13.1 R14.2 SW1.4 SW2.4 SW3.3 U1.2 U2.12 U2.18 U2.31 U2.47 U2.63 U3.2 U4.B3 U5.5 USB1.A1 USB1.A12 USB1.B1 USB1.B12 USB1.S1 X1.2 X2.2 | length 25785.1
  Top Layer w10: SW1.4 3617.3,4706.4 3618.7,4705 4127.4,4705 ; SW2.4 4127.3,4705.1 4127.4,4705 ; v1(4235,5303.5) C9.1 4378.9,5303.5 X1.2 4451.2,5233.8 4470,5215 4470,5133.9 X2.2 4513.3,5066.8 C10.1 ; v1@4242.1,4679.3 4241.2,4679.3 4215.6,4705 4127.4,4705 ; C6.2 4586.1,4927.5 C1.2 4590.1,4946.1 4615,4971 U2.12@4686.1,4971 ; C13.2 4686.5,4450 4845.6,4450 U4.B3 ; C14.1 4716.5,5311.5 4732.9,5295 4732.9,5227.1 4740,5220 4775,5220 4782.6,5227.6 4782.6,5264.3 4782.6,5360.9 C5.2 R1.2 ; v1@4772.3,4603.5 4773.5,4604.7 v1(4773.5,4605) ; C2.2 4773.5,4748.5 4782.6,4757.6 U2.18@4782.6,4815.5 ; C3.2 5022,4752 5038.5,4768.5 U2.31@5038.5,4815.5 ; v1(5055,3730) 5070,3715 U5.5 ; U2.47@5134,5167.9 5182.1,5167.9 5196.6,5153.4 C4.2 ; v1(5465,5685) D1.2 ; v1(5465,6170) D2.2 ; CARD1.6 v1(6085,5887) ; CARD1.3 v1(6085,6182.3) ; CARD1.16 CARD1.15 ; R12.1 6555.5,5038.5 C19.2 6640.6,5002.9 USB1.A1 USB1.B12 6807.3,4964.3 USB1.S1@6792.8,4949.7 ; D6.2 6585,5235 6595,5245 6705,5245 6715,5235 6752,5235 USB1.A12 6807.1,5237.1 USB1.B1 6807.3,5275.7 USB1.S1@6792.8,5290.3 ; R13.1 6785,4865 6792.8,4872.8 USB1.S1@6792.8,4949.7 ; R14.2 6762,5378 6800,5340 6800,5297.5 USB1.S1@6792.8,5290.3 ; CARD1.12 6917.1,5571.1 CARD1.14 ; USB1.S1@6925.8,4949.7 USB1.S1@6792.8,4949.7 ; USB1.S1@6925.8,5290.3 USB1.S1@6792.8,5290.3
  Top Layer w20: LED1.1 3503.8,5375 LED2.2 LED3.1 LED4.1 4233.8,5376.2 v1(4235,5375) ; v1(4235,4555) 4542.2,4555 4550,4547.2 ; v1(4235,4927.5) 4244.2,4918.3 4520.9,4918.3 C6.2 ; v1(4270,5465) 4750,5465 4786.6,5428.4 C5.2 ; C7.2 4385,3980 4408.3,4003.3 C8.2 4546.8,4003.3 4565,3985 U1.2 4795,3985 4865,4055 v1(5055,4055) v1(5465,4055) ; C12.2 4395,3461 4395.7,3460.3 ; U3.2 4745,3455 4800,3400 5432.9,3400 ; C13.2 4676.5,4440 4580,4440 4545,4475 4545,4542.2 4550,4547.2 ; v1(4773.5,4670) C2.2 ; v1(5022,4670) C3.2 ; C4.2 v1(5465,5153.4) ; SW3.3 5260.6,4603.5 C15.2 4772.3,4603.5 4573.5,4603.5 4550,4580 4550,4547.2 ; D7.3 5414.4,3660.6 5430,3645 5430,3511.8 CON5.5 5431.9,3401 5432.9,3400 ; v1(5465,4445) v1(6090,4445) v1(6327.4,4445) 6715,4445 6812.6,4542.6 CON4.1 ; CON6.5 6076.9,3436.8 6040,3400 5432.9,3400 ; v1(6085,5561.3) CARD1.13 6192.6,5502.1 6205,5489.7 6810,5489.7 6830,5509.7 6830,5570.7 CARD1.12 ; v1(6085,6705) 6098.7,6718.7 CARD1.16 ; CON1.1 6327.4,3468.5 6350,3445.9 6560.9,3445.9 6575,3460 6575,3555 6580,3560 D5.2
  Top Layer w48: C18.2 4240,3647.8 4240,3570 v1(4259.9,3550.1) v1(4281.9,3528.1) 4349.8,3460.3 4395.7,3460.3 4495,3460.3 4500.3,3455 U3.2
  Top Layer w60: D4.2@4106.3,4039.4 4185.7,3960 v1(4235,3960) v1(4235,3932) v1(4235,3901.2)
  Bottom Layer w10: v1@4267.4,5459.1 v1@4267.4,5462.4 ; v1(5055,3730) v1(5055,4055)
  Bottom Layer w20: v1(4773.5,4605) v1(4773.5,4670) ; v1(5022,4605) v1(5022,4670) ; v1(5465,4055) v1(5465,4445) v1(5465,5153.4) v1(5465,5685) v1(5465,6170) ; v1(6085,6705) v1(6085,6182.3) v1(6085,5887) v1(6085,5561.3) H2.3 6085,4780 H1.3 v1(6090,4445) ; CON1.1 BAT1.2@6327.4,4210.6 ; v1(6327.4,4445) BAT1.2@6327.4,4210.6 ; 6468.7,4205 6463.2,4210.6 BAT1.2@6327.4,4210.6 ; CON4.1 6905,4860 6925,4880 6925,4948.9 6925.8,4949.7 USB1.S1@6925.8,5290.3
  Bottom Layer w48: CON3.1 3898.3,5793.3 3930,5825 4370,5825 4403.9,5791.1 4403.9,5733.9 CON3.6 4398.3,5590 4267.4,5459.1 4235,5426.7 v1(4235,5375) v1(4235,5303.5) v1(4235,4927.5) v1(4235,4686.4) v1(4235,4555) 4235,3992.9 ; 4235,3983.8 4236.2,3985 U1.2
  Bottom Layer w60: 4235,3992.9 4235,3983.8 v1(4235,3960) v1(4235,3932) v1(4235,3901.2) 4240,3896.2 v1(4240,3573.9) 4240,3570 v1(4259.9,3550.1) v1(4281.9,3528.1) 4355,3455 U3.2
  other v1: 6695,4257.3 5133.9,4787.3 5780,4845 5780,5059.6 5720,5755 6248.2,5795 6575,5795 6930,5800 6245,6115 6574.8,6116.1 6928.6,6116.1 6245,6470 6575,6470 6928.6,6470
LTE_RX: CON3.3 U2.30 | length 1765.4
  Top Layer w10: CON3.3 4098.3,5676.7 4155,5620 v1(4885,5620) ; U2.30@5018.8,4815.5 5018.8,4853.2 v1(5023.8,4858.2)
  Bottom Layer w10: v1(4885,5620) 4886.3,5618.8 4886.3,5331.3 4920,5297.5 4987.5,5297.5 5010,5275 5010,4895 5023.8,4881.2 v1(5023.8,4858.2)
LTE_TX: CON3.2 U2.29 | length 1839.9
  Top Layer w10: CON3.2 3998.3,5641.7 4045,5595 v1(4850,5595) ; v1(4993.8,4858.5) 4999.1,4853.2 U2.29@4999.1,4815.5
  Bottom Layer w10: v1(4850,5595) 4870,5575 4870,5325 4915,5280 4985,5280 4993.8,5271.2 v1(4993.8,4858.5)
NRST: C15.1 H1.5 R10.1 SW3.1 U2.7 | length 2116.6
  Top Layer w10: U2.7@4686.1,5069.4 4686.7,5070 v1(4780,5070) ; v1(4795,4898.1) 4806.9,4910 5030,4910 5065.4,4874.6 5065.4,4873.8 5091.7,4847.4 5092.6,4847.4 5095,4845 5191.3,4845 5312.7,4723.6 SW3.1 ; C15.1 R10.1 5283,4688.9 SW3.1 ; H1.5 6290,4710 6270,4690 5351.3,4690 SW3.1
  Bottom Layer w10: v1(4780,5070) 4795,5055 v1(4795,4898.1)
RS485_DE: U2.55 U5.2 U5.3 | length 1571.4
  Top Layer w10: v1(4920,3815) U5.2 U5.3 ; v1(4940,5205) 4940,5264.2 U2.55@4940.1,5264.3
  Bottom Layer w10: v1(4920,3815) 4920,4455 4940,4475 v1(4940,5205)
RS485_RX: U2.43 U5.1 | length 1315
  Top Layer w10: U5.1 4985,3866.2 v1(4985,3930) ; v1(5085,5089.1) U2.43@5134,5089.1
  Bottom Layer w10: v1(4985,3930) 4985,4075 5085,4175 v1(5085,5089.1)
RS485_TX: U2.58 U5.4 | length 1648.8
  Top Layer w10: U2.58@4881,5264.3 4881,5209 v1(4882.5,5207.5) ; v1(4915,3715) U5.4
  Bottom Layer w10: v1(4882.5,5207.5) 4915,5175 4915,4480 4895,4460 4895,3735 v1(4915,3715)
SD_CD: CARD1.10 D1.3 R23.2 U2.37 | length 2010.7
  Top Layer w10: U2.37@5134,4971 5411,4971 5435,4995 v1(5435,5045) ; v1(5435,5580) 5451.7,5596.7 5522.8,5596.7 ; D1.3 5522.8,5596.7 ; R23.2 5522.8,5544.3 5522.8,5596.7 ; CARD1.10 6306.8,5640 6140,5640 6096.7,5596.7 5522.8,5596.7
  Bottom Layer w10: v1(5435,5045) v1(5435,5580)
SD_WP: CARD1.11 D1.4 R24.2 U2.38 | length 2545.6
  Top Layer w10: U2.38@5134,4990.7 5380.7,4990.7 5405,5015 v1(5405,5045) ; v1(5405,5467.9) 5702.9,5467.9 5710,5475 5710,5520 5698,5532 v1(5650,5532) R24.2 ; D1.4 5947.4,5647.6 5970,5625 6080,5625 6117.5,5662.5 6712.5,5662.5 6730,5645 6730,5573 CARD1.11
  Bottom Layer w10: v1(5405,5045) v1(5405,5467.9) v1@5405,5469 ; v1(5650,5532) v1(5650,5645)
SDMMC1_CK: CARD1.5 D2.3 R21.1 U2.53 | length 1827.8
  Top Layer w10: v1(4970,5325) 4979.4,5315.6 U2.53@4979.4,5264.3 ; v1(4970,6013) v1(5525,6013) R21.1 5885.6,6013 CARD1.5 ; v1(5525,6105) 5525,6129.8 D2.3
  Bottom Layer w10: v1(4970,5325) v1(4970,6013) ; v1(5525,6013) v1(5525,6105)
SDMMC1_CMD: CARD1.2 D2.4 R20.1 U2.54 | length 2096.9
  Top Layer w10: v1(4930,5325) 4959.8,5295.2 U2.54@4959.8,5264.3 ; v1(4930,6055) 5685,6055 ; D2.4 5622.2,6117.8 5685,6055 ; v1(5730,6150) 5733,6153 R20.1 5795,6240 5835.7,6280.7 CARD1.2 ; v1(5735,6055) 5685,6055
  Bottom Layer w10: v1(4930,5325) v1(4930,6055) ; v1(5730,6150) 5730,6060 v1(5735,6055)
SDMMC1_D0: CARD1.7 D1.1 R22.1 U2.39 | length 1519.5
  Top Layer w10: U2.39@5134,5010.4 5364.5,5010.4 5375,5020.9 v1(5375,5045) ; v1(5400,5720) 5520.4,5720 D1.1 5522.8,5757.8 5558,5793 R22.1 5911.7,5793 CARD1.7
  Bottom Layer w10: v1(5375,5045) 5375,5695 v1(5400,5720)
SDMMC1_D1: CARD1.8 D1.6 R26.2 U2.40 | length 1625.2
  Top Layer w10: U2.40@5134,5030.1 5330.1,5030.1 v1(5345,5045) ; v1(5400,5820) v1(5615,5820) ; v1(5615,5755) 5615,5724.6 D1.6 5799.4,5722.4 R26.2 5911.4,5723 CARD1.8
  Bottom Layer w10: v1(5345,5045) 5345,5765 v1(5400,5820) ; v1(5615,5755) v1(5615,5820)
SDMMC1_D2: CARD1.9 D2.1 R25.2 U2.51 | length 2102
  Top Layer w10: U2.51@5018.8,5264.3 5018.8,5297.2 5040,5318.3 5040,5320 v1(5045,5325) ; v1(5045,6207.4) D2.1 5527.8,6232.2 v1(5525,6235) ; v1(5525,6340) 5525,6390 5612.6,6477.6 5738.2,6477.6 ; R25.2 5740,6479.4 5738.2,6477.6 ; CARD1.9 5738.2,6477.6
  Bottom Layer w10: v1(5045,5325) v1(5045,6207.4) v1@5045,6208.3 ; v1(5525,6235) v1(5525,6340)
SDMMC1_D3: CARD1.1 D2.6 R19.1 U2.52 | length 2436.3
  Top Layer w10: U2.52@4999.1,5264.3 4999.1,5314.1 v1(5010,5325) ; v1(5010,6265) 5592.2,6265 5622.2,6235 ; D2.6 5622.2,6235 ; R19.1 5962,6533 5980,6515 5980,6425 5934.2,6379.2 CARD1.1 5908.9,6375 5660,6375 5622.2,6337.2 5622.2,6235
  Bottom Layer w10: v1(5010,5325) v1(5010,6265)
SWCLK: H1.2 R15.1 U2.49 | length 1519.7
  Top Layer w10: U2.49 5058.7,5265 v1(5315,5265) ; v1(5315,4855) 5340,4830 5695,4830 5800,4725 5940,4725 H1.2 R15.1
  Bottom Layer w10: v1(5315,4855) v1(5315,5265)
SWDIO: H1.4 R17.2 U2.46 | length 1658.4
  Top Layer w10: v1(5080,5150) 5081.7,5148.3 U2.46 ; v1(5285,4835) 5315,4805 5675,4805 5735,4745 5735,4720 5745,4710 6125,4710 H1.4 R17.2
  Bottom Layer w10: v1(5080,5150) 5255,5150 5285,5120 v1(5285,4835)
UI_SCL: CON4.4 R7.2 U2.61 | length 3314.7
  Top Layer w10: v1(4711,4290) 5320,4290 5393,4363 R7.2 6675,4325 6695,4305 6847.4,4305 CON4.4 ; v1(4822,5180) U2.61@4822,5264.3
  Bottom Layer w10: v1(4711,4290) 4711,4724 4822,4835 v1(4822,5180)
UI_SDA: CON4.3 R5.2 U2.59 | length 3817.1
  Top Layer w10: v1(4740,4267) 4747,4260 5315,4260 5395,4340 6610,4340 6640,4310 6640,4250 6725,4165 6940,4165 6990,4215 6990,4260.8 CON4.3 6852.2,4345.8 6835,4363 R5.2 ; v1(4855,5180) 4855,5215 4861.3,5221.3 U2.59@4861.3,5264.3
  Bottom Layer w10: v1(4740,4267) 4737.5,4269.5 4737.5,4727.5 4855,4845 v1(4855,5180)
USB_OTG_FS_DM: D6.4 U2.44 | length 1573.4
  Top Layer w10: U2.44@5134,5108.8 5173.6,5108.8 5175.4,5110.7 5678.3,5110.7 5771.3,5203.7 6421.3,5203.7 6456.3,5238.7 6529.4,5238.7 6558.9,5268.2 6600,5268.2 6622.4,5290.5 D6.4
USB_OTG_FS_DP: D6.6 U2.45 | length 1574.1
  Top Layer w10: U2.45@5134,5128.5 5173.6,5128.5 5175.4,5126.7 5671.7,5126.7 5764.7,5219.7 6021.5,5219.7 6028.6,5226.8 6028.6,5242.9 6035.7,5250 6081.5,5250 6088.6,5242.9 6088.6,5226.8 6095.7,5219.7 6141.5,5219.7 6148.6,5226.8 6148.6,5242.9 6155.7,5250 6201.5,5250 6208.6,5242.9 6208.6,5226.8 6215.7,5219.7 6414.7,5219.7 6449.7,5254.7 6502,5254.7 D6.6
USB_OTG_FS_VBUS: R11.2 R12.2 U2.42 | length 1548.3
  Top Layer w10: U2.42@5134,5069.4 5559.4,5069.4 5585,5095 5690,5095 5780,5185 6494.1,5185 R11.2 6555,5119 R12.2
VBAT: C14.2 D3.3 U2.1 | length 2691.5
  Top Layer w10: v1(4325,4240) D3.3 ; v1(4335,5385) 4555,5385 4661.6,5278.4 C14.2 4690.1,5191.5 U2.1
  Bottom Layer w10: v1(4325,4240) 4325,5375 v1(4335,5385)
VBUS: C19.1 D6.5 R11.1 USB1.A4 USB1.A9 USB1.B4 USB1.B9 | length 909.2
  Top Layer w10: D6.5 6585,5335 6595,5345 v1(6695,5345) ; R11.1 6591.6,5084.9 C19.1 6658.5,5071.5 6695,5035 6752.8,5035 USB1.A4 6807.1,5036.3 USB1.B9 ; USB1.A9 6807.1,5203.7 USB1.B4
  Bottom Layer w10: v1(6695,5345) 6695,5215 6705,5205 6752.8,5205 USB1.A9 ; USB1.B9 6836.5,5036.5 6850,5050 6850,5195 6841.1,5203.9 USB1.B4
VCC: C1.1 C2.1 C3.1 C4.1 C5.1 C6.1 C7.1 C8.1 C9.2 C10.2 C13.1 CARD1.4 CON1.2 CON4.2 D1.5 D2.5 D3.2 R5.1 R7.1 R8.1 R9.1 R10.2 R15.2 R16.1 R17.1 R19.2 R20.2 R21.2 R22.2 R23.1 R24.1 R25.1 R26.1 U1.3 U2.13 U2.19 U2.32 U2.48 U2.64 U4.B4 U4.C4 U5.8 X1.1 X1.4 X2.1 X2.4 | length 14153.4
  Top Layer w10: v1(4290,5159.4) X2.4 X2.1 4423.5,5087.3 C10.2 ; v1(4290,5335) 4343.5,5335 C9.2 4448.1,5336.5 X1.1 X1.4 ; C6.1 4564.1,4872.4 C1.1 4606.3,4898.4 4617.9,4910 4617.9,4942.9 4625,4950 4684.8,4950 U2.13@4686.1,4951.3 ; v1(4633.3,4640) v1@4633.5,4640.2 ; C13.1 4693.5,4490 4845,4490 U4.B4 U4.C4 ; C5.1 4753.5,5331.5 4762.9,5322.1 U2.64@4762.9,5264.3 ; U2.19@4802.3,4815.5 4802.3,4729.3 C2.1 ; C3.1@5055,4726.4 5058.4,4723 R10.2 ; C3.1 5055,4726.5 5055,4755 5058.2,4758.2 U2.32@5058.2,4815.5 ; U2.48@5134,5187.6 5219,5187.6 C4.1 ; D3.2 5482.4,4277.4 v1(5495,4290) ; R23.1 R24.1 v1(5680,5498) ; D1.5 5796.1,5685 R26.1 ; D2.5 5670,6170 5680,6160 5680,6110 5705,6085 5790,6085 5795,6080 ; v1(5680,4907) 5685,4912 R16.1 R15.2 R17.1 ; v1(5680,5830) 5797,5830 R22.2 ; v1(5681.2,6560) 5688.2,6567 R25.1 R19.2 ; R21.2 5795,6080 ; R20.2 5795,6080 ; CARD1.4 5909.2,6080 5795,6080 ; CON1.2 6425.8,3633.7 R8.1 6690.9,3678 R9.1
  Top Layer w20: v1(4290,4640.2) 4633.5,4640.2 4806.2,4640.2 ; v1(4290,4872.4) C6.1 ; v1(4290,5335) 4290,5390 4330,5430 4735,5430 4753.5,5411.5 C5.1 ; C7.1 4473.3,3868.5 C8.1 4513.3,3885 U1.3 4760,3885 4885,4010 5100,4010 ; v1(4633.3,4503.3) 4660,4476.5 C13.1 ; C2.1 4806.6,4640.6 4806.2,4640.2 ; C3.1 5055,4726.4 5055,4655 5040.2,4640.2 4806.2,4640.2 ; U5.8 5130,3865 5100,3895 5100,4010 ; C4.1 v1(5680,5186.5) ; v1(5493,4400) v1(5681.2,4400) v1(6530,4400) 6672,4400 R7.1 R5.1 6752,4397 6800,4445 6904.2,4445 CON4.2 ; v1(5495,4010) 5100,4010
  Bottom Layer w10: v1(5680,4907) v1@5681.2,4908.2 ; v1(5680,5186.5) 5681.1,5186.5 v1@5681.2,5186.6 ; v1(5680,5498) 5680.4,5498 v1@5681.2,5498.8 ; v1(5680,5830) 5680.2,5829.8 v1@5681.2,5829.8
  Bottom Layer w20: v1(4290,5335) v1(4290,5159.4) v1(4290,4872.4) v1(4290,4640.2) 4290,4215 4355,4150 4725,4150 4790,4085 4790,3920 4755,3885 U1.3 ; v1(4633.3,4503.3) v1(4633.3,4640) ; v1(5493,4400) 5495,4398 v1(5495,4290) v1(5495,4010) ; v1(5681.2,4400) 5681.2,4908.2 5681.2,5186.6 5681.2,5498.8 v1(5681.2,5681.7) 5681.2,5829.8 v1(5681.2,6133.1) v1(5681.2,6560) ; CON1.2 6425.8,4020.8 6530,4125 v1(6530,4400)
pads on no net: CON3.4 CON3.7 CON5.1 CON6.1 D5.5 H1.6 SCREW1.1 SCREW2.1 SCREW3.1 SCREW4.1 SCREW5.1 SW1.2 SW1.3 SW2.2 SW2.3 SW3.2 SW3.4 U2.2 U2.4 U2.6 U2.14 U2.15 U2.26 U2.27 U2.28 U2.33 U2.36 U2.41 U2.50 U2.56 U2.57 U2.62 U4.A2 U4.A3 U4.A4 U4.A5 U4.B1 U4.B5 U4.C1 U4.C3 U4.C5 U4.D1 U4.D4 U4.D5 U4.E1 U4.E2 U4.E3 U4.E4 U4.E5 USB1.A8 USB1.B8

## Polygon pours and split planes (outlines as drawn)
GND on Bottom Layer (solid, remove dead copper, pour order 2): 3000,7285 3000,3075 7255,3075 7255,7285
GND on Top Layer (solid, remove dead copper, pour order 0): 3055,7200 3055,3000 7290,3000 7290,7200

## Keep-outs
Board Outline Layer:
  the board outline again, w10

## Silkscreen, mask and mechanical layers (free items; w line width, h text height)
Top Silkscreen Layer:
  lines w10: 3470,5628.3 3470,7085 4926.7,7085 4926.7,5628.3 3470,5628.3
  text "RESET" at 5310,4780 h120

## Text inside footprints (layer, text, board x,y; h text height)
D4: Top Silkscreen Layer "+" at 3925,4160 h80 r180; Top Silkscreen Layer "-" at 4141.5,4160 h80 r180